# EAGLE board Wallboxsteuerung-WEMOS-14062021 (EAGLE 7.5.0)
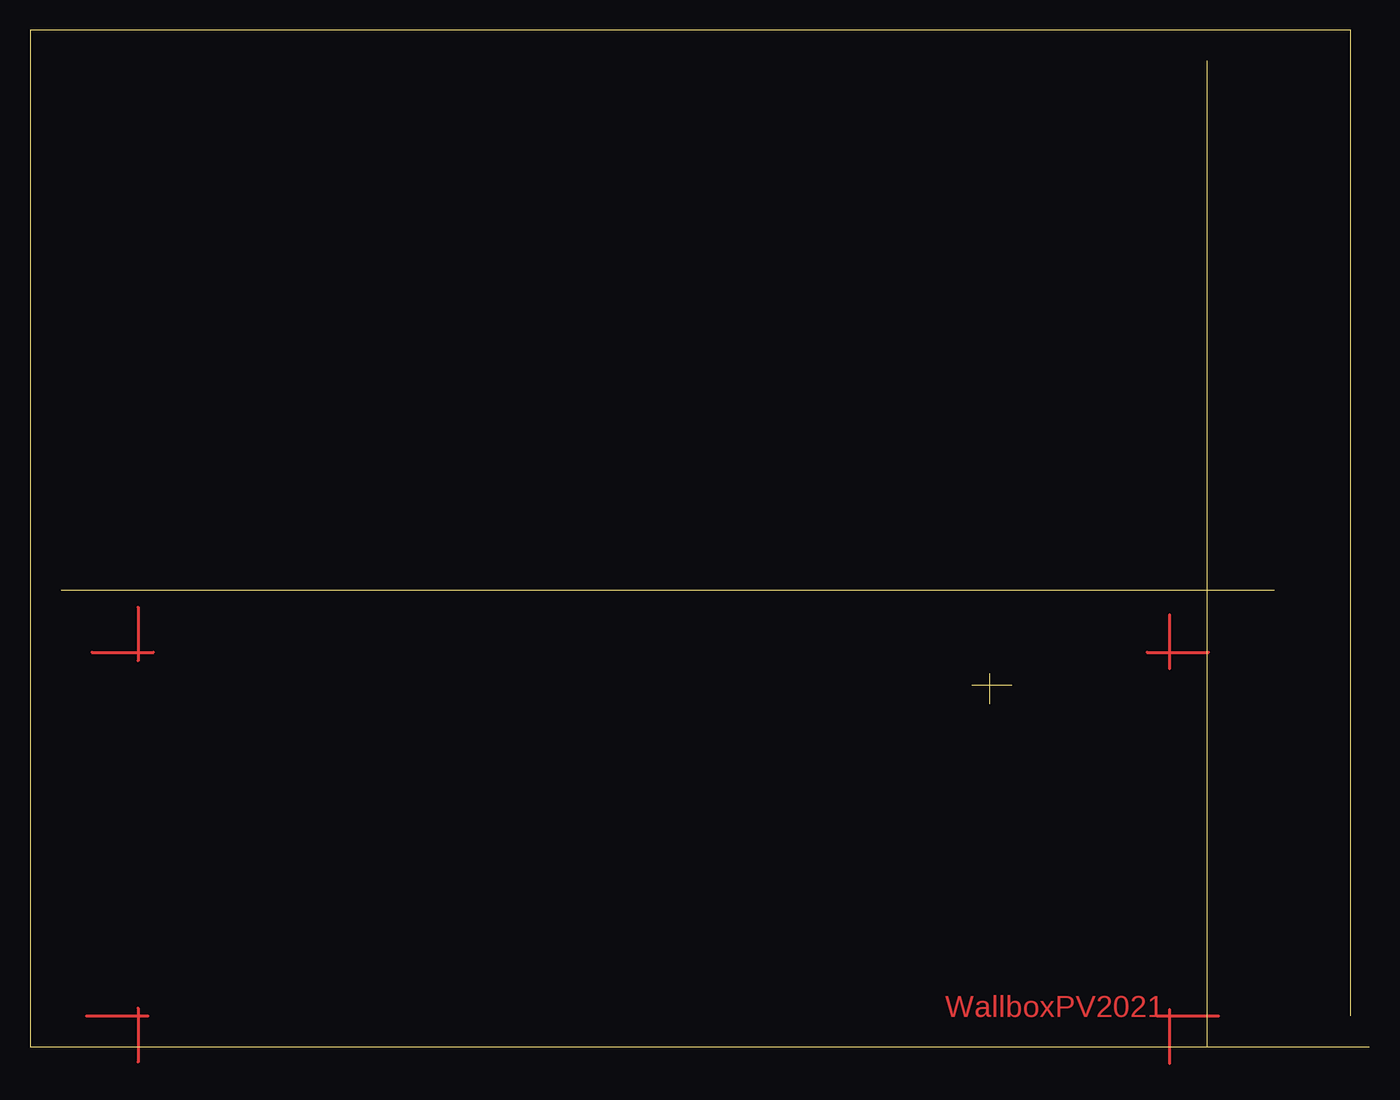
[diagram p0: board, top side]
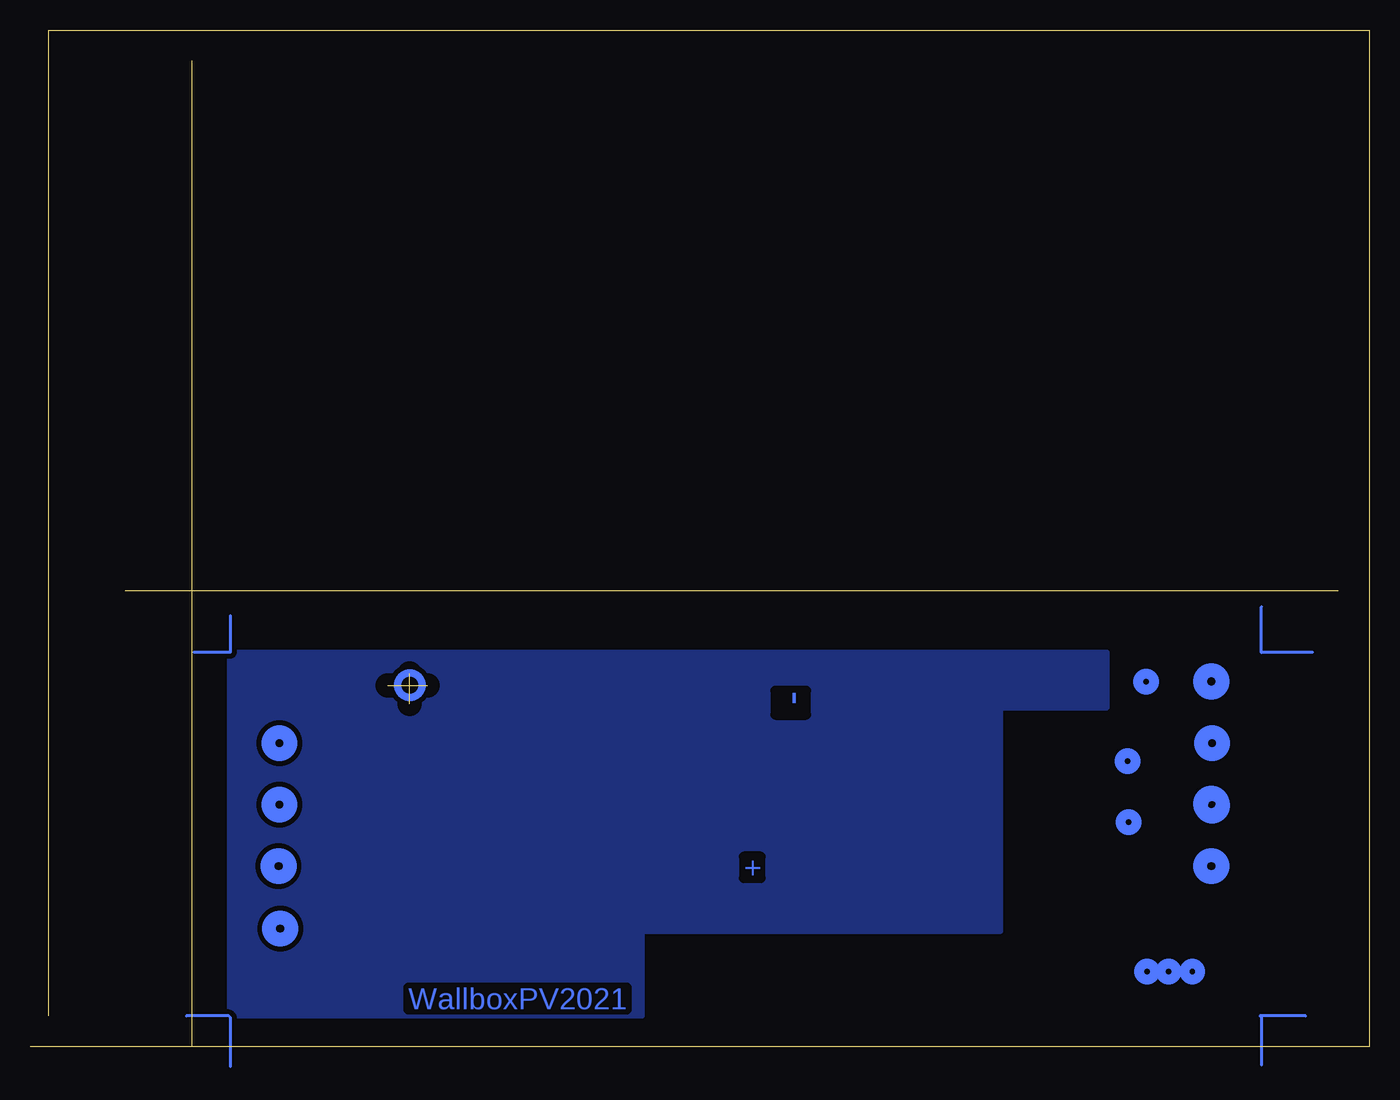
[diagram p1: board, bottom side, seen from below]

Size 110.39 x 83.81 mm. Coordinates in mm from the lower left corner, seen from the top.
Outline: 108.89,2.54 108.89,83.81 0,83.81 0,0 110.39,0
Outline: 97.06,0.04 97.06,81.31
Outline: 102.56,37.61 2.56,37.61
Outline: 79.1,28.26 79.1,30.79
Outline: 80.94,29.78 77.64,29.77
Copper layers (1*16): Top 0.035mm / dielectric 1.5mm / Bottom 0.035mm
Design rules "default": minimum track width 10mil, minimum drill 24mil, track to track 8mil, track to pad 8mil, pad to pad 8mil, via to via 8mil, smd to smd 8mil, copper to edge 40mil, drill to drill 8mil, minimum pad ring 10mil, minimum via ring 8mil, stop-mask expansion 4mil, vias tented up to drill 0mil, thermal gap 10mil

## Footprints (pad centres in the part's own frame; a part is rotated, then mirrored left to right if it is on the bottom)
WEMOS-D1-MINI = drill 1.016 pad 1.829 long: 3V3 -10.16,-10.16; 5V 12.7,-10.16; A0 -10.16,5.08; D0 -10.16,2.54; D1 12.7,2.54; D2 12.7,0; D3 12.7,-2.54; D4 12.7,-5.08; D5 -10.16,0; D6 -10.16,-2.54; D7 -10.16,-5.08; D8 -10.16,-7.62; GND 12.7,-7.62; RESET -10.16,7.62; RX 12.7,5.08; TX 12.7,7.62
1X04 = drill 1.016 long: 1 -3.81,0; 2 -1.27,0; 3 1.27,0; 4 3.81,0
DIL08 = drill 0.813 long: 1 -3.81,-3.81; 2 -1.27,-3.81; 3 1.27,-3.81; 4 3.81,-3.81; 5 3.81,3.81; 6 1.27,3.81; 7 -1.27,3.81; 8 -3.81,3.81
1X06 = drill 1.016 long: 1 -6.35,0; 2 -3.81,0; 3 -1.27,0; 4 1.27,0; 5 3.81,0; 6 6.35,0
0309V = drill 0.813 octagon: 1 -1.27,0; 2 1.27,0
DS-01 = drill 0.813 long: 1 0,-3.81; 2 0,3.81
MKDSN1,5/2-5,08 = drill 1.3 pad 2: 1 -2.561,0.025; 2 2.519,0.025

## Placement (x,y rotation side)
ESP8266  Wemos D1 Mini  [WEMOS-D1-MINI]  -42.55,17.78 0 top  (outside the outline)
JP2  [1X04]  -48.89,-11.43 0 top  (outside the outline)
MAX485  MAX3468CPA  [DIL08]  -66.67,-49.53 0 top  (outside the outline)
MICRO-SD1  [1X06]  -46.35,-5.72 0 top  (outside the outline)
R1  220  [0309V]  -51.44,-16.51 0 top  (outside the outline)
R2  10K  [0309V]  -71.12,-22.23 0 top  (outside the outline)
R3_H8  150  [0309V]  -71.12,-58.42 0 top  (outside the outline)
TASTER  [DS-01]  -71.75,-11.43 0 top  (outside the outline)
X4  MKDSN1,5/2-5,08  [MKDSN1,5/2-5,08]  -67.94,-38.73 0 top  (outside the outline)

## Library data of the parts
ESP8266 = uwe_esp8266modules1
JP2 MICRO-SD1 = pinhead
MAX485 = maxim; OC_FARNELL: unknown; OC_NEWARK: unknown
R1 R2 R3_H8 = rcl
TASTER = switch-dil; OC_FARNELL: unknown; OC_NEWARK: unknown
X4 = con-phoenix-508

## Nets
GND: JP2.2 MAX485.5 MICRO-SD1.6 TASTER.2
N$1: ESP8266.D4 R1.1
N$37: ESP8266.3V3 JP2.3 MAX485.8 MICRO-SD1.1 R2.1
N$39: JP2.1 R1.2
N$40: ESP8266.D3 R2.2 TASTER.1
N$42: ESP8266.D0 MICRO-SD1.2
N$43: ESP8266.D7 MICRO-SD1.3
N$44: ESP8266.D5 MICRO-SD1.4
N$45: ESP8266.D6 MICRO-SD1.5
N$46: MAX485.7 R3_H8.2 X4.1
N$47: MAX485.6 R3_H8.1 X4.2
N$49: ESP8266.RX MAX485.1
N$50: ESP8266.TX MAX485.4
N$51: ESP8266.D8 MAX485.2 MAX485.3

## Tracks (layer width: path | path; a pad name or v marks a point on that pad's centre or on a via)
GND  (3 unrouted)
  pour Bottom (isolate 0.406): 21.59,32.52 93.98,32.52 93.98,2.54 59.92,2.54 59.92,9.53 30.34,9.53 30.34,27.94 21.59,27.94
N$1  (1 unrouted)
N$18
  Top 0.254: 8.89,36.26 8.89,31.81 | 8.89,3.17 8.89,-1.27 | 93.92,35.62 93.92,31.18 | 93.92,3.05 93.92,-1.4
N$29
  Bottom 0.254: 8.93,32.54 4.66,32.54
N$30
  Bottom 0.254: 8.89,32.51 8.89,36.28
N$31
  Bottom 0.254: 8.89,2.4 8.89,-1.5
N$32
  Bottom 0.254: 5.23,2.54 9,2.54
N$33
  Bottom 0.254: 94.03,2.54 97.53,2.54
N$34
  Bottom 0.254: 93.89,-1.63 93.89,2.41
N$35
  Bottom 0.254: 93.89,35.54 93.89,32.54 96.89,32.54
N$36
  Top 0.254: 5.08,32.51 10.16,32.51 | 4.64,2.54 9.72,2.54 | 92.08,32.51 97.16,32.51 | 92.9,2.54 97.98,2.54
N$37  (4 unrouted)
N$39  (1 unrouted)
N$40  (2 unrouted)
N$42  (1 unrouted)
N$43  (1 unrouted)
N$44  (1 unrouted)
N$45  (1 unrouted)
N$46  (2 unrouted)
N$47  (2 unrouted)
N$49  (1 unrouted)
N$50  (1 unrouted)
N$51  (2 unrouted)
(copper drawn outside any net)
  shapes: Bottom circle x16

## Text on the board
Top: WallboxPV2021
Bottom: - | + | WallboxPV2021